# EAGLE board Schematic (EAGLE 9.6.2), part 1 of 2
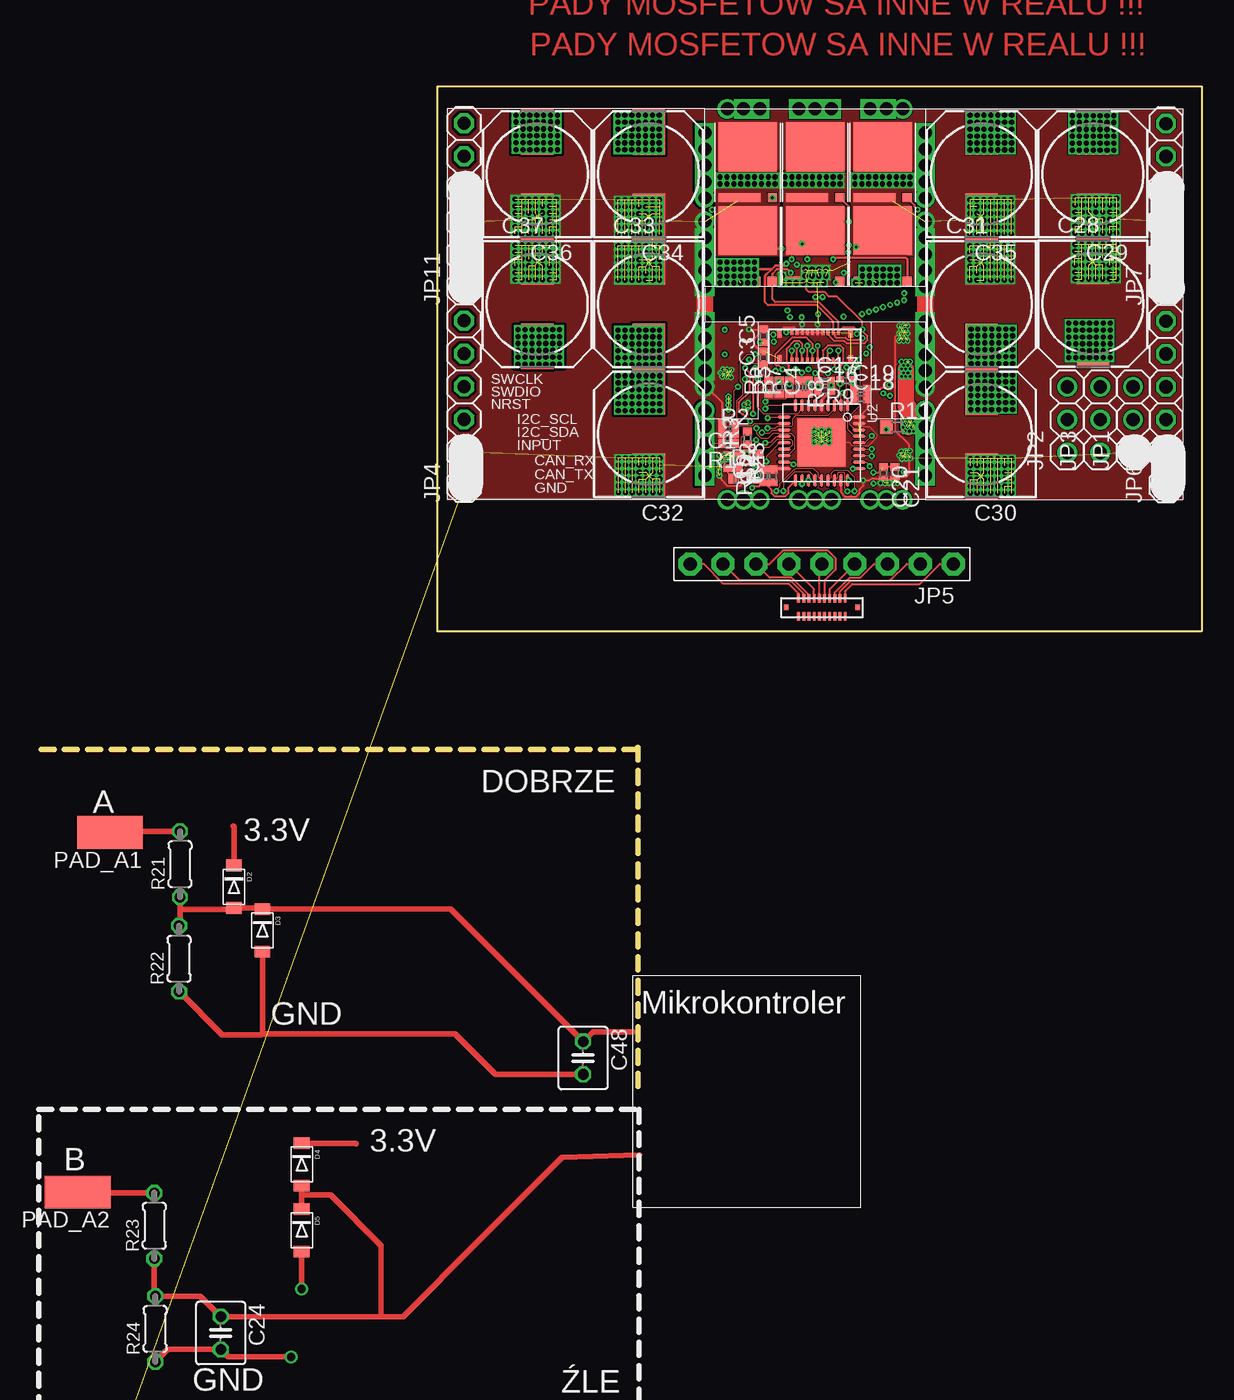
[diagram p0: board, top side]
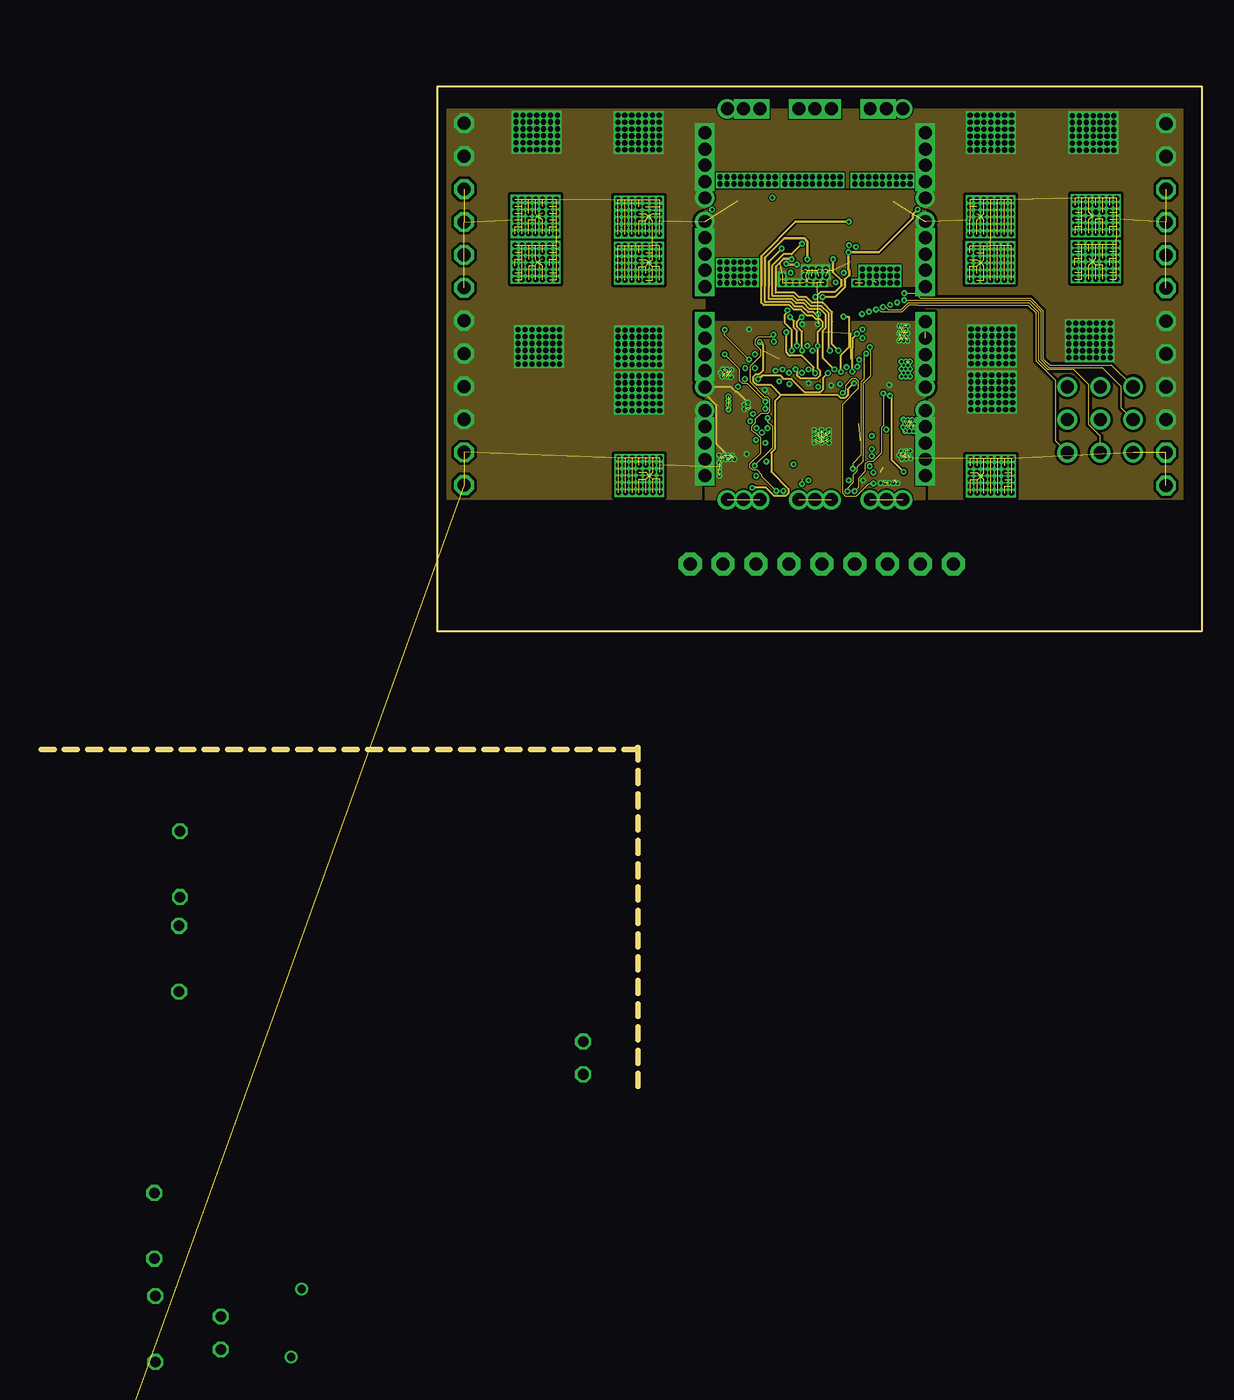
[diagram p1: board, inner layer Route2]
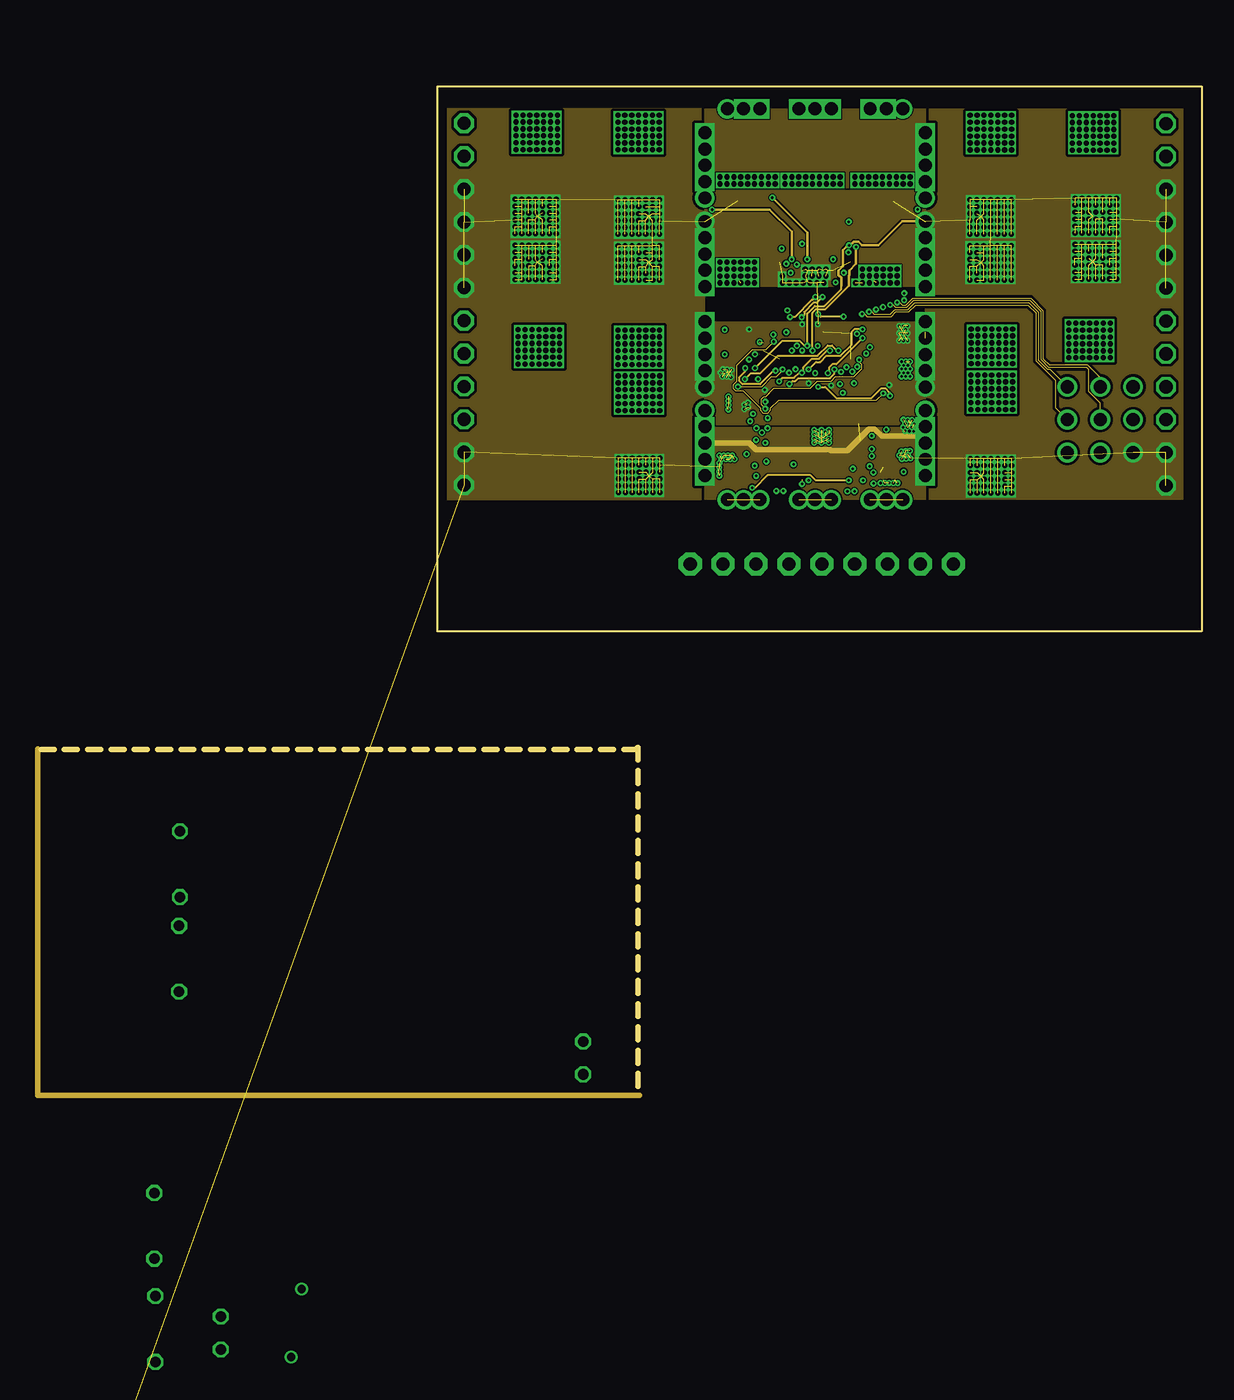
[diagram p2: board, inner layer Route15]
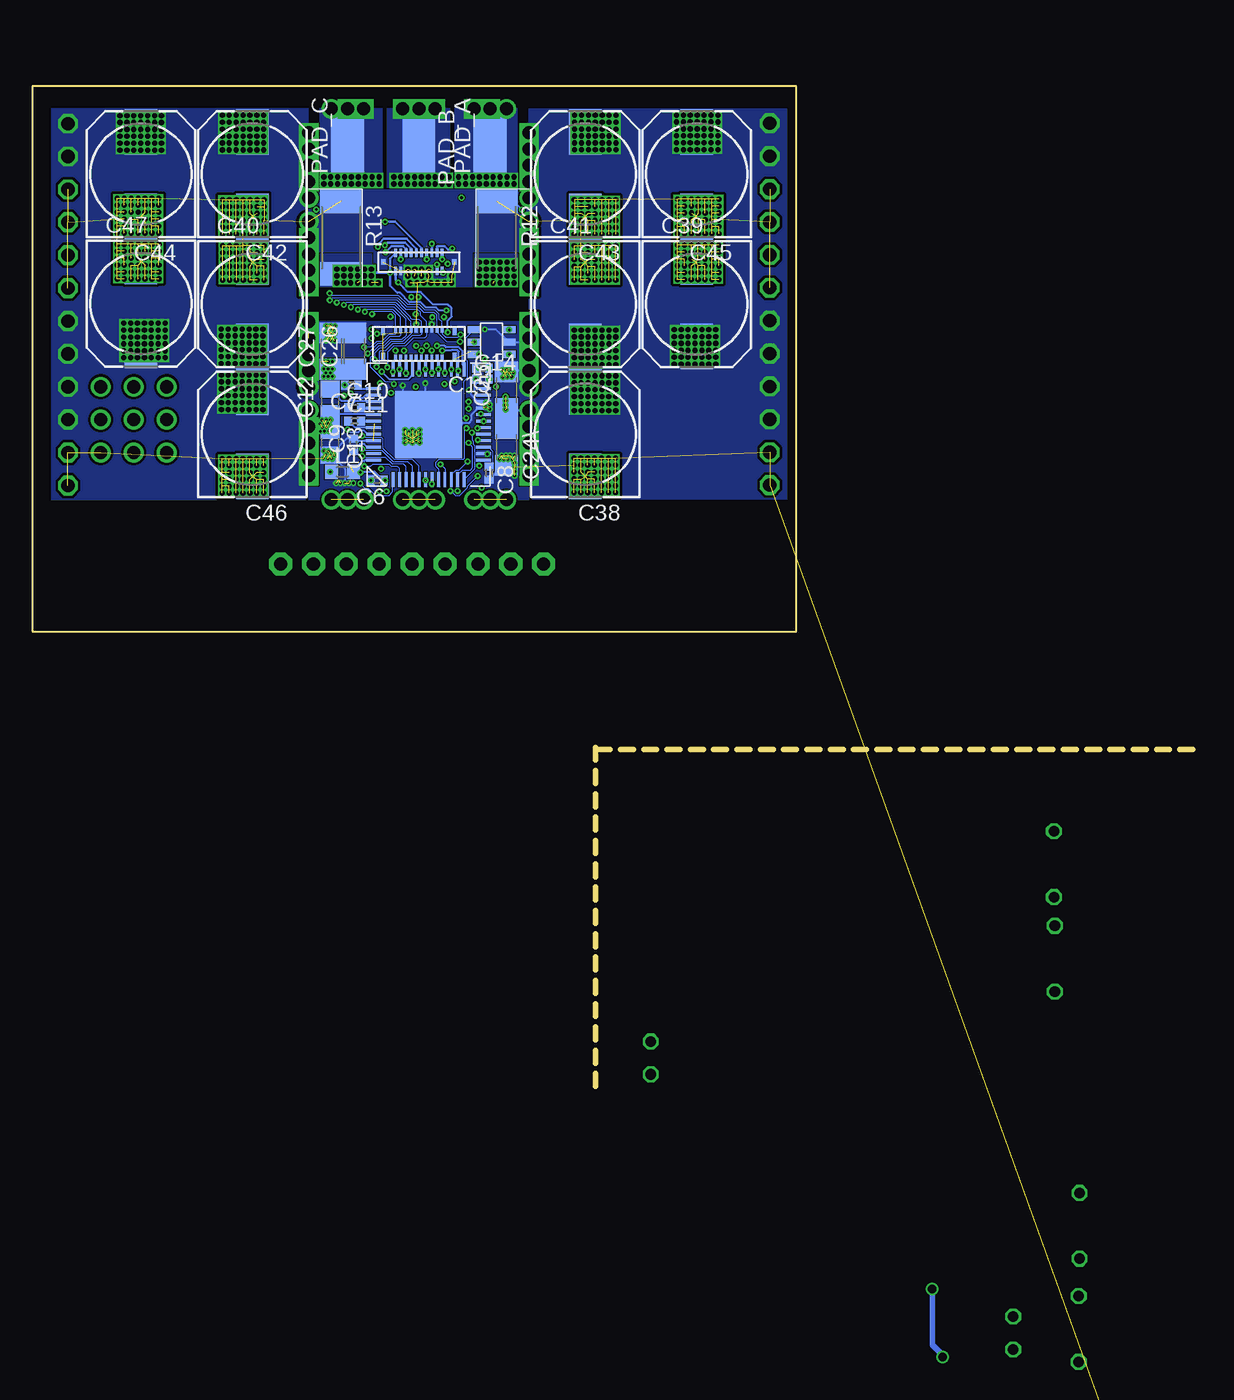
[diagram p3: board, bottom side, seen from below]

Size 59 x 42.08 mm. Coordinates in mm from the lower left corner, seen from the top.
Outline: 0,0 0,42.08 59,42.08 59,0 0,0
Copper layers (1*2*15*16): Top 0.035mm / dielectric 0.2mm / Route2 0.017mm / dielectric 0.2mm / Route15 0.017mm / dielectric 0.2mm / Bottom 0.035mm
Design rules "default *": minimum track width 3.5mil, minimum drill 0.2mm, track to track 3.5mil, track to pad 3.5mil, pad to pad 3.5mil, via to via 3.5mil, smd to smd 0mil, copper to edge 0mil, drill to drill 0mil, minimum pad ring 5mil, minimum via ring 5mil, stop-mask expansion 1mil, vias tented up to drill 0mil, thermal gap 0mil
Milling: 42 lines

## Footprints (pad centres in the part's own frame; a part is rotated, then mirrored left to right if it is on the bottom)
R0402 = smd 0.6 x 0.7: 1 -0.5,0; 2 0.5,0
C0805 = smd 1.3 x 1.5: 1 -0.95,0; 2 0.95,0
C025-040X050 = drill 0.813 octagon: 1 -1.27,0; 2 1.27,0
C1206 = smd 1.6 x 1.8: 1 -1.4,0; 2 1.4,0
150CLZ-0810 = smd 3.5 x 2.5: + 3.25,0; - -3.25,0
SML0603 = smd 0.8 x 0.8: A 0.75,0; C -0.75,0
SOD-123FL = smd 0.91 x 1.22: A 1.637,0; C -1.637,0
1X03 = drill 1.016: 1 -2.54,0; 2 0,0; 3 2.54,0
1X06 = drill 1.016 octagon: 1 -6.35,0; 2 -3.81,0; 3 -1.27,0; 4 1.27,0; 5 3.81,0; 6 6.35,0
1X09-BIG = drill 1.016 pad 1.778 octagon: 1 -10.16,0; 2 -7.62,0; 3 -5.08,0; 4 -2.54,0; 5 0,0; 6 2.54,0; 7 5.08,0; 8 7.62,0; 9 10.16,0
R0603 = smd 1 x 1.1: 1 -0.85,0; 2 0.85,0
0204/5 = drill 0.813 octagon: 1 -2.54,0; 2 2.54,0
SMD2,54-5,08 = smd 2.54 x 5.08: 1 0,0
Q5B = smd 3.8 x 4.52: D -0.4,-0.635 | smd 0.686 x 0.71: G 3.51,1.27 | smd 0.686 x 3.25: S 3.51,-1.27
R2512 = smd 1.8 x 3.2: 1 -2.8,0; 2 2.8,0
VFQFPN36-HS = smd 1 x 0.23: 1 -2.9,2; 2 -2.9,1.5; 3 -2.9,1; 4 -2.9,0.5; 5 -2.9,0; 6 -2.9,-0.5; 7 -2.9,-1; 8 -2.9,-1.5; 9 -2.9,-2; 19 2.9,-2; 20 2.9,-1.5; 21 2.9,-1; 22 2.9,-0.5; 23 2.9,0; 24 2.9,0.5; 25 2.9,1; 26 2.9,1.5; 27 2.9,2 | smd 0.23 x 1: 10 -2,-2.9; 11 -1.5,-2.9; 12 -1,-2.9; 13 -0.5,-2.9; 14 0,-2.9; 15 0.5,-2.9; 16 1,-2.9; 17 1.5,-2.9; 18 2,-2.9; 28 2,2.9; 29 1.5,2.9; 30 1,2.9; 31 0.5,2.9; 32 0,2.9; 33 -0.5,2.9; 34 -1,2.9; 35 -1.5,2.9; 36 -2,2.905 | smd 3.7 x 3.7: GND 0,0
RECEPTACLE_20_0.4_5024262030 = smd 0.32 x 0.65: CASE_11 -0.95,-0.1; CASE_12 -0.95,-2.1; CASE_21 4.55,-0.1; CASE_22 4.55,-2.1 | smd 0.22 x 0.475: P$1 0,0; P$2 0.4,0; P$3 0.8,0; P$4 1.2,0; P$5 1.6,0; P$6 2,0; P$7 2.4,0; P$8 2.8,0; P$9 3.2,0; P$10 3.6,0; P$11 0,-2.19; P$12 0.4,-2.19; P$13 0.8,-2.19; P$14 1.2,-2.19; P$15 1.6,-2.19; P$16 2,-2.19; P$17 2.4,-2.19; P$18 2.8,-2.19; P$19 3.2,-2.19; P$20 3.6,-2.19
PLUG_20_0.4_5024302012 = smd 0.35 x 0.44: CASE_1 -0.95,-0.69; CASE_2 4.55,-0.69 | smd 0.22 x 0.66: P$1 0,0; P$2 0.4,0; P$3 0.8,0; P$4 1.2,0; P$5 1.6,0; P$6 2,0; P$7 2.4,0; P$8 2.8,0; P$9 3.2,0; P$10 3.6,0; P$11 0,-1.38; P$12 0.4,-1.38; P$13 0.8,-1.38; P$14 1.2,-1.38; P$15 1.6,-1.38; P$16 2,-1.38; P$17 2.4,-1.38; P$18 2.8,-1.38; P$19 3.2,-1.38; P$20 3.6,-1.38
S-PQFP-G48 = smd 0.229 x 1.143: 1-EN_GATE 0,0; 2-INHA 0.5,0; 3-INLA 1,0; 4-INHB 1.5,0; 5-INLB 2,0; 6-INHC 2.5,0; 7-INLC 3,0; 8-NFAULT 3.5,0; 9-NSCS 4,0; 10-SDI 4.5,0; 11-SDO 5,0; 12-SCLK 5.5,0; 25-GL_C 5.5,8.5; 26-SL_C 5,8.5; 27-SH_C 4.5,8.5; 28_GH_C 4,8.5; 29-GH_B 3.5,8.5; 30-SH_B 3,8.5; 31-SL_B 2.5,8.5; 32-GL_B 2,8.5; 33-GL_A 1.5,8.5; 34-SL_A 1,8.5; 35-SH_A 0.5,8.5; 36-GH_A 0,8.5 | smd 1.143 x 0.229: 13-PWRGD 7,1.5; 14-GND1 7,2; 15-AVDD 7,2.5; 16-SO1 7,3; 17-SO2 7,3.5; 18-SO3 7,4; 19-SN3 7,4.5; 20-SP3 7,5; 21-SN2 7,5.5; 22-SP2 7,6; 23-SN1 7,6.5; 24-SP1 7,7; 37-VCP_LSD -1.5,7; 38-VCPH -1.5,6.5; 39-CP2H -1.5,6; 40-CP2L -1.5,5.5; 41-PVDD -1.5,5; 42-CP1L -1.5,4.5; 43-CP1H -1.5,4; 44-VDRAIN -1.5,3.5; 45-GND2 -1.5,3; 46-DVDD -1.5,2.5; 47-WAKE -1.5,2; 48-VREG -1.5,1.5 | smd 5.17 x 5.17: GND 2.75,4.25
SOT-23 = smd 0.55 x 1: 1 0,0; 2 0.95,0; 3 1.9,0; 4 1.9,2.7; 5 0.95,2.7; 6 0,2.7

## Placement (x,y rotation side)
C1  1nF  [R0402]  22.49,15.99 180 top
C2  1nF  [R0402]  24.36,13.69 180 top
C3  1nF  [R0402]  25.18,21.13 90 top
C4  1nF  [R0402]  28.66,18.85 90 top
C5  100nF  [R0402]  25.18,22.82 90 top
C6  1uF  [R0402]  32.35,11.66 180 bottom
C7  1uF  [R0402]  34.37,19.01 180 bottom
C8  1uF  [R0402]  23.72,12.22 270 bottom
C9  1uF  [R0402]  34.2,14.4 90 bottom
C10  0.047uF  [R0402]  34.11,17.28 0 bottom
C11  0.047uF  [R0402]  34.11,16.25 0 bottom
C12  4.7uF  [C0805]  36,17.76 90 bottom
C13  4.7uF  [C0805]  36,14.56 270 bottom
C14  1nF  [R0402]  24.26,19.48 0 bottom
C15  1nF  [R0402]  24.26,20.33 180 bottom
C16  100nF  [R0402]  29.9,18.58 0 top
C17  4.7uF  [R0402]  29.9,19.28 0 top
C18  100nF  [R0402]  32.68,17.98 0 top
C19  4.7uF  [R0402]  32.68,18.68 0 top
C20  100nF  [R0402]  34.44,12.18 270 top
C21  4.7uF  [R0402]  35.33,12.18 270 top
C22  100nF  [R0402]  25.21,12 90 top
C23  4.7uF  [R0402]  25.91,12 90 top
C24  [C025-040X050]  -16.74,-54.18 270 top  (outside the outline)
C24\  22uF  [C1206]  22.38,14.23 270 bottom
C25  22uF  [C1206]  22.38,18.63 90 bottom
C26  22uF  [C1206]  34.12,21.65 90 bottom
C27  22uF  [C1206]  35.92,21.65 90 bottom
C28  220uf  [150CLZ-0810]  50.61,25.31 270 top
C29  220uf  [150CLZ-0810]  50.61,35.31 90 top
C30  220uf  [150CLZ-0810]  42.01,15.21 90 top
C31  220uf  [150CLZ-0810]  42.01,25.27 270 top
C32  220uf  [150CLZ-0810]  16.3,15.22 90 top
C33  220uf  [150CLZ-0810]  16.3,25.27 270 top
C34  220uf  [150CLZ-0810]  16.3,35.31 90 top
C35  220uf  [150CLZ-0810]  42.01,35.31 90 top
C36  220uf  [150CLZ-0810]  7.7,35.31 90 top
C37  220uf  [150CLZ-0810]  7.7,25.27 270 top
C38  220uf  [150CLZ-0810]  16.3,15.22 90 bottom
C39  220uf  [150CLZ-0810]  7.7,25.27 270 bottom
C40  220uf  [150CLZ-0810]  42.01,25.27 270 bottom
C41  220uf  [150CLZ-0810]  16.3,25.27 270 bottom
C42  220uf  [150CLZ-0810]  42.01,35.31 90 bottom
C43  220uf  [150CLZ-0810]  16.3,35.31 90 bottom
C44  220uf  [150CLZ-0810]  50.61,35.31 90 bottom
C45  220uf  [150CLZ-0810]  7.7,35.31 90 bottom
C46  220uf  [150CLZ-0810]  42.01,15.21 90 bottom
C47  220uf  [150CLZ-0810]  50.61,25.31 270 bottom
C48  [C025-040X050]  11.24,-32.94 270 top  (outside the outline)
D1  Red  [SML0603]  23.62,11.8 0 top
D2  [SOD-123FL]  -15.72,-19.72 270 top  (outside the outline)
D3  [SOD-123FL]  -13.52,-23.09 270 top  (outside the outline)
D4  [SOD-123FL]  -10.48,-41.15 270 top  (outside the outline)
D5  [SOD-123FL]  -10.48,-46.25 270 top  (outside the outline)
JP1  [1X03]  53.71,16.34 90 top
JP2  [1X03]  48.63,16.34 90 top
JP3  [1X03]  51.17,16.34 90 top
JP4  [1X06]  2.06,17.64 90 top
JP5  [1X09-BIG]  29.67,5.21 180 top
JP6  [1X06]  56.25,17.61 90 top
JP7  [1X06]  56.25,32.86 90 top
JP11  [1X06]  2.06,32.88 90 top
L1  1mH  [R0603]  35.04,12.32 0 bottom
L2  [0204/5]  -29.36,-104.56 0 top  (outside the outline)
L3  [0204/5]  -29.36,-108.17 0 top  (outside the outline)
L4  [0204/5]  -29.36,-111.79 0 top  (outside the outline)
PAD_A  [SMD2,54-5,08]  23.64,37.81 0 bottom
PAD_A1  [SMD2,54-5,08]  -25.3,-15.53 90 top  (outside the outline)
PAD_A2  [SMD2,54-5,08]  -27.78,-43.29 90 top  (outside the outline)
PAD_B  [SMD2,54-5,08]  29.15,37.81 180 bottom
PAD_C  [SMD2,54-5,08]  34.66,37.81 0 bottom
Q1  CSD17573Q5B  [Q5B]  24.59,37 270 top
Q2  CSD17573Q5B  [Q5B]  24.58,30.54 270 top
Q3  CSD17573Q5B  [Q5B]  29.79,37 270 top
Q4  CSD17573Q5B  [Q5B]  29.79,30.54 270 top
Q5  CSD17573Q5B  [Q5B]  35,37 270 top
Q6  CSD17573Q5B  [Q5B]  34.99,30.54 270 top
Q7  CSD17573Q5B  [Q5B]  -30.21,-62.27 0 top  (outside the outline)
Q8  CSD17573Q5B  [Q5B]  -30.21,-67.48 0 top  (outside the outline)
Q9  CSD17573Q5B  [Q5B]  -30.21,-72.69 0 top  (outside the outline)
Q10  CSD17573Q5B  [Q5B]  -30.21,-77.9 0 top  (outside the outline)
Q11  CSD17573Q5B  [Q5B]  -30.21,-83.1 0 top  (outside the outline)
Q12  CSD17573Q5B  [Q5B]  -30.21,-88.31 0 top  (outside the outline)
Q13  CSD17573Q5B  [Q5B]  -30.21,-93.52 0 top  (outside the outline)
Q14  CSD17573Q5B  [Q5B]  -30.21,-98.72 0 top  (outside the outline)
R1  100k  [R0402]  22.49,14.5 180 top
R2  4.99kR  [R0402]  22.49,15.29 0 top
R3  100k  [R0402]  23.93,14.94 90 top
R4  4.99kR  [R0402]  23.22,13.09 270 top
R5  100k  [R0402]  26.38,18.85 90 top
R6  4.99kR  [R0402]  25.6,18.85 90 top
R7  100k  [R0402]  27.17,18.85 90 top
R8  4.99kR  [R0402]  27.96,18.85 270 top
R9  100K  [R0402]  31.58,19.37 180 top
R10  10k  [R0402]  22.43,13.09 270 top
R11  100R  [R0603]  35.5,15.77 0 top
R12  5mohm  [R2512]  23.15,30.41 270 bottom
R13  5mohm  [R2512]  35.16,30.41 270 bottom
R21  [0204/5]  -19.89,-17.98 90 top  (outside the outline)
R22  [0204/5]  -19.96,-25.28 90 top  (outside the outline)
R23  [0204/5]  -21.87,-45.9 90 top  (outside the outline)
R24  [0204/5]  -21.8,-53.87 90 top  (outside the outline)
U2  STM32F10XTXU6HS  [VFQFPN36-HS]  29.65,14.56 270 top
U$1  RECEPTACLE_20_0.4_5024262030  [RECEPTACLE_20_0.4_5024262030]  30.96,23.32 0 bottom
U$2  PLUG_20_0.4_5024302012  [PLUG_20_0.4_5024302012]  27.88,2.54 0 top
U$21  DRV8305  [S-PQFP-G48]  31.15,11.73 0 bottom
U$30  PLUG_20_0.4_5024302012  [PLUG_20_0.4_5024302012]  30.95,29.22 0 bottom
U$31  TPD4E001  [SOT-23]  22.17,21.39 90 bottom
U$32  RECEPTACLE_20_0.4_5024262030  [RECEPTACLE_20_0.4_5024262030]  30.96,20.9 180 top

## Library data of the parts
C1-C11 C14-C23 = rcl
C12 C13 C24 C24\ C25-C48 = rcl; SPICEPREFIX: C
D1 = led
D2-D5 JP1-JP7 JP11 = adafruit
L1 R11-R13 = resistor
L2-L4 = rcl; SPICEPREFIX: L
PAD_A PAD_A1 PAD_A2 PAD_B PAD_C = wirepad
Q1-Q14 = CSD_Mosfet
R1-R10 R21-R24 = rcl; SPICEPREFIX: R
U2 = stm32
U$1 U$2 U$30 U$32 = Molex_2
U$21 = drv8305lbr
U$31 = tpd4e001

## Nets
+3V3: C5.1 C6.1 C18.1 C19.1 C20.1 C21.1 C22.1 C23.1 L1.2 R9.1 U2.1 U2.19 U2.27 U$21.48-VREG U$31.5
+VCC: Q9.D Q10.D Q11.D
ADC_CA: U2.15 U$21.16-SO1
ADC_CC: U2.16 U$21.18-SO3
ADC_VA: C4.1 R7.1 R8.2 U2.7 U$31.1
ADC_VB: C3.1 R5.1 R6.2 U2.8 U$31.3
ADC_VC: C2.1 R3.1 R4.2 U2.10 U$31.4
ADC_VMOT: C1.1 R1.1 R2.2 U2.11 U$31.6
CAN_RX: JP1.3 U2.23 U$1.P$10
CAN_TX: JP1.2 U2.24 U$1.P$9
ENGATE: U2.2 U$21.1-EN_GATE
GH_A: Q1.G U$21.36-GH_A U$30.P$7 U$32.P$4
GH_B: Q3.G U$21.29-GH_B U$30.P$6 U$32.P$5
GH_C: Q5.G U$21.28_GH_C U$30.P$3 U$32.P$8
GL_A: Q2.G U$21.33-GL_A U$30.P$20 U$32.P$11
GL_B: Q4.G U$21.32-GL_B U$30.P$11 U$32.P$20
GL_C: Q6.G U$21.25-GL_C U$30.P$2 U$32.P$9
GND: C1.2 C2.2 C3.2 C4.2 C5.2 C6.2 C7.2 C8.2 C9.2 C13.2 C16.2 C17.2 C18.2 C19.2 C20.2 C21.2 C22.2 C23.2 C24\.2 C25.2 C26.2 C27.2 C28.- C29.- C30.- C31.- C32.- C33.- C34.- C35.- C36.- C37.- C38.- C39.- C40.- C41.- C42.- C43.- C44.- C45.- C46.- C47.- JP1.1 JP4.1 JP4.2 JP6.1 JP6.2 JP7.1 JP7.2 JP7.3 JP7.4 JP11.1 JP11.2 JP11.3 JP11.4 Q4.S Q8.S Q12.S Q13.S Q14.S R2.1 R4.1 R6.1 R8.1 R10.1 R12.1 R13.1 U2.5 U2.18 U2.26 U2.35 U2.36 U2.GND U$1.P$5 U$1.P$8 U$21.14-GND1 U$21.21-SN2 U$21.22-SP2 U$21.45-GND2 U$21.GND U$30.CASE_1 U$30.CASE_2 U$30.P$12 U$30.P$13 U$30.P$14 U$30.P$15 U$30.P$16 U$30.P$17 U$30.P$18 U$31.2 U$32.CASE_11 U$32.CASE_12 U$32.CASE_21 U$32.CASE_22 U$32.P$14 U$32.P$15 U$32.P$16 U$32.P$17 U$32.P$18 U$32.P$19
GND_A: C14.2 U$21.24-SP1 U$30.P$10 U$32.P$1
GND_C: C15.2 U$21.20-SP3 U$30.P$4 U$32.P$7
I2C_SCL: JP3.3 U2.33 U$1.P$7
I2C_SDA: JP3.2 U2.34 U$1.P$6
INPUT: JP3.1 U2.9 U$1.P$4
LED: D1.A U2.22
N$1: JP5.9 U$2.P$1
N$2: C16.1 C17.1 L1.1 U2.6
N$3: JP5.8 U$2.P$2
N$4: JP5.7 U$2.P$3 U$2.P$6
N$5: JP5.6 U$2.P$4
N$6: JP5.5 U$2.P$5
N$7: JP5.2 U$2.P$9
N$8: JP5.4 U$2.P$7
N$9: JP5.3 U$2.P$8
N$10: C9.1 U$21.46-DVDD
N$11: JP5.1 U$2.P$10
N$12: C8.1 U$21.15-AVDD
N$13: C7.1 U$21.37-VCP_LSD
N$14: C11.2 U$21.42-CP1L
N$15: PAD_A1.1 R21.2
N$16: C11.1 U$21.43-CP1H
N$17: C48.1 D2.A D3.C R21.1 R22.2
N$18: C48.2 D3.A R22.1
N$19: PAD_A2.1 R23.2
N$20: C10.2 U$21.40-CP2L
N$21: C10.1 U$21.39-CP2H
N$22: R11.1 U$21.44-VDRAIN
N$23: C12.2 U$21.38-VCPH
N$24: D2.C
N$25: C24.1 D4.A D5.C R23.1 R24.2
N$26: C24.2 D5.A R24.1
N$27: D4.C
N$29: Q7.S Q8.D
N$31: Q8.G
N$32: Q7.G
N$41: L2.1 Q9.S Q12.D
N$42: L4.1 Q10.S Q13.D
N$43: L3.1 Q11.S Q14.D
N$45: L2.2 L3.2 L4.2
N$81: D1.C R10.2
NFAULT: U2.3 U$21.8-NFAULT
NRST: JP2.1 R9.2 U2.4 U$1.P$3
PWM_AH: U2.29 U$21.2-INHA
PWM_AL: U2.30 U$21.3-INLA
PWM_BH: U2.31 U$21.4-INHB
PWM_BL: U2.32 U$21.5-INLB
PWM_CH: U2.21 U$21.6-INHC
PWM_CL: U2.20 U$21.7-INLC
PWRGD: U$21.13-PWRGD
SH_A: PAD_A.1 Q1.S Q2.D R7.2 U$21.35-SH_A U$30.P$9 U$32.P$2
SH_B: PAD_B.1 Q3.S Q4.D R5.2 U$21.30-SH_B U$30.P$8 U$32.P$3
SH_C: PAD_C.1 Q5.S Q6.D R3.2 U$21.27-SH_C U$30.P$5 U$32.P$6
SL_A: C14.1 Q2.S R12.2 U$21.23-SN1 U$21.34-SL_A U$30.P$19 U$32.P$12
SL_B: U$21.31-SL_B U$32.P$13
SL_C: C15.1 Q6.S R13.2 U$21.19-SN3 U$21.26-SL_C U$30.P$1 U$32.P$10
SPI_CS: U2.17 U$21.9-NSCS
SPI_MISO: U2.13 U$21.11-SDO
SPI_MOSI: U2.14 U$21.10-SDI
SPI_SCK: U2.12 U$21.12-SCLK
SWCLK: JP2.3 U2.28 U$1.P$2
SWDIO: JP2.2 U2.25 U$1.P$1
VCC: Q7.D
VMOTOR: C12.1 C13.1 C24\.1 C25.1 C26.1 C27.1 C28.+ C29.+ C30.+ C31.+ C32.+ C33.+ C34.+ C35.+ C36.+ C37.+ C38.+ C39.+ C40.+ C41.+ C42.+ C43.+ C44.+ C45.+ C46.+ C47.+ JP4.3 JP4.4 JP4.5 JP4.6 JP6.3 JP6.4 JP6.5 JP6.6 JP7.5 JP7.6 JP11.5 JP11.6 Q1.D Q3.D Q5.D R1.2 R11.2 U$21.41-PVDD
WAKE: U$21.47-WAKE